# Altium PCB GPS_Proj.PcbDoc (part 2 of 2)
Units mil, origin at the board's own origin, x right, y up, seen from the top; angles counter-clockwise.
Board outline 1417.32 x 6305 mil, 4 copper layers (Top Layer, GND, VCC, Bottom Layer); 115 components, 144 nets, 456 pads, 265 vias.
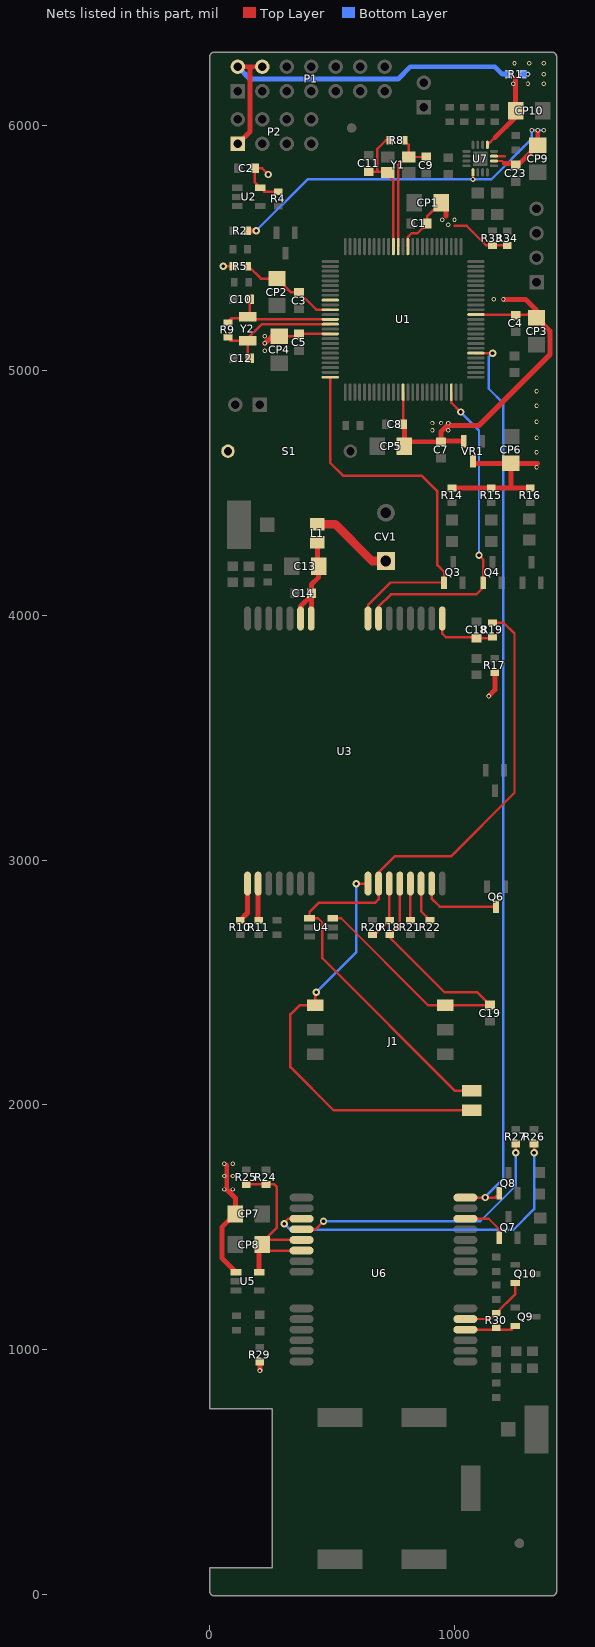
[diagram p4: the nets of this part, all layers, seen from the top]

## Via types
v1: diameter 30, hole 15, Top Layer to Bottom Layer, 219 vias
v2: diameter 18, hole 10, Top Layer to Bottom Layer, 43 vias
v3: diameter 20, hole 10, Top Layer to Bottom Layer, 3 vias

## Nets (pads, with @x,y where several pads share a name; then routed paths per layer and width w, separated by ;. In a path a pad name is that pad's centre, name@x,y a point inside that pad or via, vN(x,y) a via of type N, cw(c..) or ccw(c..) an arc to the next point about the centre after c; other vN are vias at no path point) (continued)
PLUSE: Q8.1 U1.56 U6.28 | length 3725.4
  Top Layer w10: U6.28@1044.65,1621.97 1165.91,1621.97 Q8.1@1182.6,1638.66 ; U1.56@1087.24,5070.55 v1(1155.55,5070.55)
  Bottom Layer w10: v1@1135,1621.97 1128.48,1628.48 1200,1700 1200,4865 1140,4925 1140,5055 v1(1155.55,5070.55)
  other v1: 1125,1621.97
PWRKEY: Q6.3 U3.14 | length 327.9
  Top Layer w10: U3.14@906.65,2904.13 906.65,2843.35 940,2810 Q6.3@1160,2810
REF+: U1.9
RI: Q3.1 U1.25 U3.23 | length 1622.3
  Top Layer w10: U1.25@492.76,4972.13 492.76,4622.24 545,4570 865,4570 930,4505 930,4205 957.6,4177.4 Q3.1@957.6,4133.66 738.66,4133.66 646.81,4041.81 U3.23@646.81,3986.81
RXDG: R27.1 U6.4 | length 1118.8
  Top Layer w10: U6.4@375.35,1492.05 432.05,1492.05 v1(465,1525) ; v1(1250,1805) R27.1@1250,1840.47
  Bottom Layer w10: v1(465,1525) 1105,1525 1250,1670 v1(1250,1805)
RXDM: R11.1 U3.2 | length 150.4
  Top Layer w20: U3.2@197.99,2904.13 197.99,2756.54 R11.1@200,2754.53
SIM_CLK: R21.1 U3.12 | length 149.6
  Top Layer w10: R21.1@820,2754.53 U3.12@820.04,2904.13 U3.12@820.04,2904.13
SIM_DATA: R18.2 R20.1 U3.10 | length 244.1
  Top Layer w10: R20.1@665,2695.47 675.94,2695.47 R18.2@735,2754.53 ; R18.2@733.43,2754.53 U3.10@733.43,2904.13
SIM_GND: J1.5 J1.8 U3.8 | length 1759.3
  Top Layer w10: v1(435,2460) 430.83,2455.83 J1.5@430.83,2407.01 367.01,2407.01 330,2370 330,2155 506.34,1978.66 J1.8@1070.59,1978.66 ; v1(599.13,2904.13) U3.8@646.81,2904.13
  Bottom Layer w10: v1(435,2460) 599.13,2624.13 v1(599.13,2904.13)
SIM_PRE: J1.4 R19.2 U3.9 U4.1 | length 2927.1
  Top Layer w10: J1.4@1070.59,2057.4 1002.6,2057.4 460,2600 460,2745 442.6,2762.4 U4.1@407.76,2762.4 407.76,2787.76 445,2825 675,2825 690.12,2840.12 U3.9@690.12,2904.13 690.12,2950.12 755,3015 985,3015 1245,3275 1245,3925 1200.47,3969.53 R19.2@1155,3969.53
SIM_RST: R22.1 U3.13 | length 164.8
  Top Layer w10: U3.13@863.35,2904.13 863.35,2791.18 R22.1@900,2754.53
SIM_VDD: C19.1 J1.1 R18.1 U3.11 U4.6 | length 1550.9
  Top Layer w10: U4.6@502.24,2762.4 537.6,2762.4 892.99,2407.01 J1.1@962.32,2407.01 C19.1@1145,2407.01 ; U3.11@776.73,2904.13 776.73,2737.2 R18.1@735,2695.47 735,2685 960,2460 1093.46,2460 C19.1@1145,2408.46
STATUS: Q4.1 U1.48 U3.22 | length 1339.9
  Top Layer w10: U3.22@690.12,3986.81 690.12,4035.12 740,4085 1088.94,4085 Q4.1@1117.6,4113.66 ; U1.48@986.85,4911.1 986.85,4868.15 v1(1025,4830) ; v1(1100,4245) 1117.6,4227.4 Q4.1@1117.6,4133.66
  Bottom Layer w10: v1(1025,4830) 1100,4755 v1(1100,4245)
TXDG: R26.1 U6.3@375.35,1535.35 | length 1412.7
  Top Layer w10: v1(305,1515) 305,1520 320.35,1535.35 U6.3@375.35,1535.35 ; v1(1325,1805) R26.1@1325,1840.47
  Bottom Layer w10: v1(305,1515) 330,1490 1240,1490 1325,1575 v1(1325,1805)
TXDM: R10.1 U3.1 | length 161.9
  Top Layer w20: R10.1@125,2754.53 154.68,2784.21 U3.1@154.68,2904.13
V_ANT: Q10.2 R30.2 U6.19 | length 290.8
  Top Layer w10: U6.19@1044.65,1125.91 1146.38,1125.91 R30.2@1170,1149.53 1248.66,1228.19 Q10.2@1248.66,1272.6
VAA: C3.1 CP2.1 R5.2 U1.11 | length 406.7
  Top Layer w10: R5.2@159.53,5425 209.41,5375.12 CP2.1@275,5375.12 331.65,5318.46 C3.1@365,5318.46 435.75,5247.72 U1.11@492.76,5247.72
VBAT: C23.1 CP6.1 CP7.1 CP9.1 CV1.1 L1.1 R2.2 R14.2 R15.2 R16.2 R17.2 R29.1 U5.1 U7.5 U7.10 U7.11 VR1.3 | length 3424.5
  Top Layer w10: VR1.3@1075,4628.66 VR1.3@1083.78,4619.88 ; v3@1075.47,5780 U7.5@1075.47,5808.9 ; U7.10@1161.1,5855.16 1194.84,5855.16 1205,5845 ; U7.11@1161.1,5874.84 1205,5874.84 ; C23.1@1250,5838.46 C23.1@1258.35,5838.46
  Top Layer w20: 70,1755 70,1655 104.88,1620.12 CP7.1@104.88,1555 50,1500.12 50,1375.16 U5.1@107.76,1317.4 ; R2.2@154.53,5570 v1(190,5570) ; v3(205,915) R29.1@205,950.47 ; R14.2@990,4519.53 R15.2@1150,4519.53 1230,4519.53 ; VR1.3@1083.78,4619.88 CP6.1@1230,4619.88 ; v3(1140,3670) 1165,3695 R17.2@1165,3765.47 ; 1205,5845 1243.46,5845 C23.1@1250,5838.46 ; C23.1@1258.35,5838.46 CP9.1@1340,5920.12 v2(1340,5980) ; R16.2@1310,4519.53 1230,4519.53 ; 1339.88,4619.88 CP6.1@1230,4619.88 ; 1230,4519.53 CP6.1@1230,4619.88
  Top Layer w35: L1.1@440,4372.4 512.6,4372.4 663.43,4221.57 CV1.1@720,4221.57
  Bottom Layer w10: v1(190,5570) 400,5780 v3(1075,5780) 1150,5780 1315,5945 v2(1315,5980) v2(1340,5980) v2(1365,5980)
  other v2: 60,1655 95,1655 60,1710 95,1710 60,1760 95,1760 1335,4605 1335,4665 1335,4725 1335,4790 1335,4855 1335,4915
VCC: C1.1 C2.1 C4.1 C5.1 C7.1 C8.1 CP1.1 CP3.1 CP4.1 CP5.1 R4.1 R5.1 R33.2 R34.2 S1.2 U1.16 U1.38 U1.64 U1.87 U2.5 VR1.2 | length 2811.5
  Top Layer w10: v1(55,5425) R5.1@95.47,5425 ; v1(240,5800) 215,5825 C2.1@183.46,5825 183.46,5769.65 U2.5@207.24,5745.87 223.58,5729.53 R4.1@280,5729.53 ; CP4.1@255.12,5140.12 CP4.1@285,5140.12 ; CP4.1@302.95,5140 365,5140 374.29,5149.29 U1.16@492.76,5149.29 ; C8.1@788.46,4780 790,4781.54 U1.38@790,4911.1 ; U1.87@809.68,5505.59 809.68,5544.69 825,5560 848.46,5560 C1.1@888.46,5600 888.46,5628.35 CP1.1@945.12,5685 CP1.1@965,5665.12 ; C7.1@945,4708.46 C7.1@947.88,4711.34 ; 1000,5590 1050,5590 1129.53,5510.47 R33.2@1155,5510.47 R34.2@1215,5510.47 ; U1.64@1087.24,5228.03 1297.8,5228.03 1309.88,5240.12 CP3.1@1335,5240.12 ; CP3.1@1335,5235.12 CP3.1@1335,5240.12 ; CP3.1@1340,5240.12 CP3.1@1335,5240.12
  Top Layer w20: v2(225,5110) CP4.1@255.12,5140.12 ; C8.1@790,4781.54 795.12,4776.42 CP5.1@795.12,4690 813.58,4708.46 C7.1@945,4708.46 ; C7.1@947.88,4711.34 965,4711.34 ; 965,5630 CP1.1@965,5665.12 ; VR1.2@1037.6,4711.34 965,4711.34 ; v2(1200,5290) 1290,5290 1335,5245 CP3.1@1335,5240.12 ; CP3.1@1335,5215.12 1390,5160.12 1390,5065 1100,4775 970,4775 945,4750 C7.1@945,4708.46 ; C7.1@945,4708.46 962.12,4708.46 965,4711.34
  other v2: 910,4755 975,4755 910,4785 945,4785 975,4785 225,5080 225,5140 1160,5290 975,5595 950,5615 1000,5615
VCC5V: CP10.1 R1.1 U7.13 | length 343.2
  Top Layer w10: U7.13@1134.53,5921.1 1163.43,5950 1165,5950 ; CP10.1@1249.88,6053.3 CP10.1@1249.88,6060
  Top Layer w20: 1165,5950 1249.88,6034.88 CP10.1@1249.88,6053.3 ; CP10.1@1249.88,6060 1249.88,6195.12
  Bottom Layer w20: R1.1@1279.53,6210 v2(1300,6210)
  other v2: 1240,6170 1300,6170 1365,6170 1365,6210 1245,6255 1305,6255 1365,6255
VCC_RF: Q9.2 R30.1 U6.18 | length 210.2
  Top Layer w10: U6.18@1044.65,1082.6 1233.66,1082.6 Q9.2@1248.66,1097.6
VDD_EXT_2.8V: C18.1 R19.1 U3.16 | length 274.7
  Top Layer w10: U3.16@949.96,3986.81 949.96,3925.04 965,3910 C18.1@1090,3910 ; C18.1@1090,3906.54 1151.06,3906.54 R19.1@1155,3910.47
VGPRS4V4: C13.1 C14.1 L1.2 U3.24 U3.25 | length 485.4
  Top Layer w20: U3.25@371.22,3986.81 371.22,4036.22 C14.1@414.53,4079.53 ; U3.24@414.53,3986.81 415.79,3988.07 C14.1@415.79,4080.79 ; L1.2@440,4297.6 440,4205.12 C13.1@445.12,4200 ; C13.1@445.12,4214.88 C13.1@445.12,4200 ; C14.1@414.53,4079.53 414.53,4074.53 C14.1@415.79,4090.47 ; C14.1@414.53,4079.53 414.53,4089.21 C14.1@415.79,4090.47 ; C14.1@414.53,4079.53 C14.1@415.79,4080.79 ; C14.1@415.79,4080.79 C14.1@415.79,4090.47 ; C14.1@415.79,4090.47 415.79,4125.79 445.12,4155.12 C13.1@445.12,4200
VGPS3V3: CP8.1 R24.2 R25.2 U5.5 U6.5 U6.6 | length 848.2
  Top Layer w10: R25.2@150,1675.47 R24.2@230,1675.47 264.53,1675.47 275,1665 275,1499.88 CP8.1@223.86,1448.74 ; CP8.1@215.12,1430 CP8.1@215.12,1414.88 ; U6.6@375.35,1405.43 224.57,1405.43 CP8.1@215.12,1414.88 ; U6.5@375.35,1448.74 CP8.1@223.86,1448.74 ; CP8.1@215.12,1414.88 202.56,1427.44 CP8.1@223.86,1448.74
  Top Layer w20: U5.5@202.24,1317.4 202.24,1402.01 CP8.1@215.12,1414.88
VJTAG: P1.2 P1.4 P2.1 R1.2 | length 1584.6
  Top Layer w20: P2.1@115,5925 165,5975 165,6240 ; P1.2@115,6240 165,6240 ; P1.4@215,6240 165,6240
  Bottom Layer w20: P1.2@115,6240 165,6190 770,6190 820,6240 1165,6240 1195,6210 R1.2@1210,6210
WAKE_UP: Q7.1 U6.26 | length 189.5
  Top Layer w10: U6.26@1044.65,1535.35 1139.65,1535.35 1182.6,1492.4 Q7.1@1182.6,1458.66
XTAL2_IN: C9.1 R8.2 U1.89 Y1.3 | length 531.5
  Top Layer w10: U1.89@770.32,5505.59 769.75,5506.16 769.75,5839.75 794.96,5864.96 Y1.3@808.31,5864.96 ; R8.2@794.53,5940 813.31,5921.22 Y1.3@813.31,5871.5 884.57,5871.5 C9.1@885,5871.93
XTAL2_OUT: C11.1 R8.1 U1.90 Y1.1 | length 544.7
  Top Layer w10: C11.1@650,5811.54 685,5811.54 ; Y1.1@721.69,5801.97 750.63,5773.03 U1.90@750.63,5505.59 ; Y1.1@726.69,5808.5 723.66,5811.54 685,5811.54 ; R8.1@735.47,5940 720,5940 685,5905 685,5811.54
XTAL_IN: C10.1 R9.2 U1.13 Y2.2 | length 520.1
  Top Layer w10: R9.2@70,5194.53 87.58,5212.11 Y2.2@162.11,5212.11 ; Y2.2@155,5219.21 Y2.2@162.11,5212.11 ; C10.1@163.46,5290 163.46,5213.46 Y2.2@162.11,5212.11 ; U1.13@492.76,5208.35 165.87,5208.35 Y2.2@162.11,5212.11
XTAL_OUT: C12.1 R9.1 U1.14 Y2.1 | length 536.6
  Top Layer w10: R9.1@70,5135.47 84.68,5120.79 Y2.1@155,5120.79 ; C12.1@163.46,5050 155,5058.46 Y2.1@155,5120.79 ; U1.14@492.76,5188.66 213.66,5188.66 155,5130 Y2.1@155,5120.79
pads on no net: Designator8.1 Designator9.1 J1.3@1017.32,2542.01 J1.6 P1.8 P1.10 P1.12 P1.13 P1.14 U1.24 U1.44 U1.52 U1.55 U1.57 U1.58 U2.3 U3.4 U3.6 U3.7 U3.18 U3.19 U3.20 U6. U6.1 U6.2 U6.3@490,1657.32 U6.8 U6.9 U6.10 U6.12 U6.21 U6.22 U6.23 U6.24 U6.25 U6.27 U7.12@1055,5915 Y1.2 Y1.4

## Polygon pours and split planes (outlines as drawn)
GGND on Top Layer "Bottom Layer-No Net" (solid, remove dead copper, pour order 4): 25,6275 25,25 1400,25 1400,6275
GGND on Bottom Layer "Bottom Layer-No Net" (solid, remove dead copper, pour order 6): 25,6275 25,25 1400,25 1400,6260 1385,6275
GGND on GND (split plane): 21.4,1871.4 23.05,1870.29 25,1869.9 1139.9,1869.9 1139.9,1810.1 25,1810.1 23.05,1809.71 21.4,1808.6 20.1,1807.31 20.1,1872.69
GGND on GND (split plane): 1392.13,25.1 25.1,25.1 25.1,89.9 255,89.9 258.92,90.29 262.69,91.43 266.17,93.29 269.21,95.79 271.71,98.83 273.57,102.31 274.71,106.08 275.1,110 275.1,760 274.71,763.92 273.57,767.69 271.71,771.17 269.21,774.21 266.17,776.71 262.69,778.57 258.92,779.71 255,780.1 25.1,780.1 25.1,1797.89 27.11,1799.9 1145,1799.9 1146.95,1800.29 1148.6,1801.4 1149.71,1803.05 1150.1,1805 1150.1,1875 1149.71,1876.95 1148.6,1878.6 1146.95,1879.71 1145,1880.1 27.11,1880.1 25.1,1882.11 25.1,4522.89 32.11,4529.9 925,4529.9 926.95,4530.29 928.6,4531.4 929.71,4533.05 930.1,4535 930.1,4575 929.71,4576.95 928.6,4578.6 926.95,4579.71 925,4580.1 30.1,4580.1 30.1,6274.02 1392.13,6274.02
GGND on GND (split plane): 20.29,4573.05 21.4,4571.4 23.05,4570.29 25,4569.9 919.9,4569.9 919.9,4540.1 30,4540.1 28.05,4539.71 26.4,4538.6 20.1,4532.31 20.1,4574.02
VCC on VCC (split plane): 1204.9,6252.89 1204.9,4922.11 867.99,4585.19 25.19,4585.19 25.19,6264.9 1192.89,6264.9
VBAT on VCC (split plane): 1397.23,15.1 20.1,15.1 20.1,89.9 255,89.9 258.92,90.29 262.69,91.43 266.17,93.29 269.21,95.79 271.71,98.83 273.57,102.31 274.71,106.08 275.1,110 275.1,760 274.71,763.92 273.57,767.69 271.71,771.17 269.21,774.21 266.17,776.71 262.69,778.57 258.92,779.71 255,780.1 20.1,780.1 20.1,4575 870.1,4575 872.05,4575.39 873.7,4576.49 1213.6,4916.4 1214.71,4918.05 1215.1,4920 1215.1,6255 1214.71,6256.95 1213.6,6258.6 1198.6,6273.6 1196.95,6274.71 1195,6275.1 25.19,6275.1 25.19,6279.12 25.04,6279.9 1397.23,6279.9

## Other copper
Top Layer:
  rectangle net GGND: 955,6125 1195,6210
  rectangle net VBAT: 45,1625 110,1775
  rectangle net VBAT: 1300,5960 1380,5995
  rectangle net VBAT: 1190,5835 1215,5880
  rectangle net VCC: 895,4740 990,4800
  rectangle net VCC: 1145,5270 1215,5305
  rectangle net VCC: 935,5580 1015,5630
  rectangle net VCC: 210,5070 240,5150
  rectangle net VBAT: 1305,4575 1390,4950
  rectangle net VCC5V: 1220,6150 1385,6275
GND (plane layer: these items are gaps in the copper):
  lines w10: 20,20.19 20,1800 25,1805 1145,1805 1145,1875 25,1875 20,1880 20,4525 30,4535 925,4535 925,4575 25,4575 25,6274.21 20.1,6279.12 1397.23,6279.12 1397.23,20.1 1397.13,20 20.19,20 20,20.19
VCC (plane layer: these items are gaps in the copper):
  lines w10: 20.1,6270 1195,6270 1210,6255 1210,4920 870.1,4580.1 20.1,4580.1 20.1,6279.12

## Silkscreen, mask and mechanical layers (free items; w line width, h text height)
Top Overlay:
  text "来电" at 1035,4345 h30
  text "状态" at 1195,4340 h30
  text "网络" at 1345,4340 h30
Top Solder:
  rectangle: 970,6155 1180,6275
  rectangle: 1220,6150 1385,6275
Mechanical 1:
  the board outline again, w10
Mechanical 3:
  text "4" at 1990.06,11571.87 h49.21
  text "10" at 2528.56,11565.06 h49.21
  text "4" at 3078.56,11560.06 h49.21
  text "4" at 5590.06,10971.87 h49.21
  text "X" at 2811.98,4790.96 h49.21
Mechanical 6:
  drawing of 720 lines, arcs and shapes, not listed
  text "DAUGHTER-BOARD PANEL" at 4120.69,11758.8 h49.21
  text "DESIGN INFORMATION" at 1906.55,11758.04 h49.21
  text "BOARD NAME:" at 3386.55,11758.04 h49.21
  text "BOARD TECHNOLOGY" at 1906.55,11658.04 h49.21
  text "BOARD SIZE (REFER ALSO PROFILING INFORMATION)" at 3806.55,11658.04 h49.21
  text "X" at 4541.55,11538.04 h49.21
  text "(MIN. TRACK/   PADS  /   CLEARANCE     IN 0.001'')" at 1846.55,11458.04 h49.21
  text "MINIMUM ANNULAR RING 0.05MM (0.002'') EXTERNAL PER IPC-2221 CLASS 3 LEVEL C AND IS THE" at 1906.55,11358.05 h49.21
  text "MANUFACTURING REGISTRATION ALLOWANCE" at 1906.55,11268.04 h49.21
  text "LAND SIZE CALCULATION MINIMUM - NOMINAL HOLE SIZE + 0.508MM (0.020'')" at 1906.55,11158.04 h49.21
  text "CIRCUIT TYPE:" at 1906.55,10978.04 h49.21
  text "SS" at 2806.55,10978.04 h49.21
  text "DS" at 3506.55,10978.04 h49.21
  text "X" at 4081.55,10978.04 h49.21
  text "PTH" at 4206.55,10978.04 h49.21
  text "ML" at 4636.55,10978.04 h49.21
  text "X" at 4786.55,10978.04 h49.21
  text "No. of Layers" at 4906.55,10978.04 h49.21
  text "FINGER CONNECTOR DIM PER:" at 1906.55,10858.04 h49.21
  text "AS SHOWN" at 4906.55,10858.04 h49.21
  text "No. OFF TOTAL" at 2566.55,10748.04 h49.21
  text "ONE SIDE" at 4206.55,10748.04 h49.21
  text "BOTH SIDES" at 4906.55,10738.04 h49.21
  text "X" at 3379.46,10636.97 h49.21
  text "VIAS:" at 1906.55,10633.04 h49.21
  text "NONE" at 2356.55,10633.04 h49.21
  text "X" at 2686.55,10633.04 h49.21
  text "FEED THRU'" at 2806.55,10633.04 h49.21
  text "TENTED" at 3506.55,10633.04 h49.21
  text "BURIED LAYER SEQUENCE" at 4206.55,10633.04 h49.21
  text "UNIQUE DRILL" at 2806.55,10513.04 h49.21
  text "2 SIZE" at 3506.55,10513.04 h49.21
  text "BLIND LAYER SEQUENCE" at 4206.55,10513.04 h49.21
  text "Layer Stack Manager (PCB)" at 3301.55,10423.04 h49.21
  text "X" at 4786.55,10423.04 h49.21
  text "AS SHOWN" at 4906.55,10423.04 h49.21
  text "LAYER CONSTRUCTION PER:" at 1906.55,10418.04 h49.21
  text "ARTWORK:" at 1906.55,10308.04 h49.21
  text "MANUAL" at 2806.55,10308.04 h49.21
  text "DIGITISED" at 3506.55,10308.04 h49.21
  text "X" at 4086.55,10308.04 h49.21
  text "CAD" at 4206.55,10308.04 h49.21
  text "TYPE" at 4636.55,10308.04 h49.21
  text "ARTWORK/PATTERN MASTER LIST" at 1906.55,10123.04 h49.21
  text "DESCRIPTION" at 1956.55,10028.04 h49.21
  text "DRAWING No./CAD FILE REF." at 2691.55,10028.04 h49.21
  text "LAYER NAME" at 4316.55,10028.04 h49.21
  text "GERBER FILE REF" at 5133.56,10025.04 h49.21
  text "PCB FILE" at 1896.55,9928.04 h49.21
  text "Top Paste Mask" at 4250.57,9828.04 h49.21
  text "GTP" at 3975,9826.1 h49.21
  text "GTP" at 5928.56,9825.04 h49.21
  text "GERBER FILE" at 1896.55,9823.04 h49.21
  text "GTO" at 3975,9727.67 h49.21
  text "GTO" at 5926.55,9727.05 h49.21
  text "Top Overlay" at 4250.57,9726.03 h49.21
  text "GERBER FILE" at 1896.55,9723.04 h49.21
  text "Top Solder Mask" at 4250.57,9630.04 h49.21
  text "GTS" at 3975,9629.25 h49.21
  text "GTS" at 5928.56,9625.04 h49.21
  text "GERBER FILE" at 1896.55,9623.04 h49.21
  text "Board Layer 1" at 5134.82,9531.94 h49.21
  text "Top Layer" at 4250.57,9528.05 h49.21
  text "GTL" at 5928.56,9525.04 h49.21
  text "GERBER FILE" at 1896.55,9523.04 h49.21
  text "GTL" at 3975,9522.95 h49.21
  text "Board Layer 2" at 5125.69,9132.02 h49.21
  text "GP1" at 3973.4,9130.37 h49.21
  text "GP1" at 5930.09,9130.37 h49.21
  text "GND" at 4247.72,9128.1 h49.21
  text "GERBER FILE" at 1896.55,9125.4 h49.21
  text "Board Layer 3" at 5129.62,8939.11 h49.21
  text "GP2" at 3971.08,8928.44 h49.21
  text "GP2" at 5927.77,8928.44 h49.21
  text "VCC" at 4245.06,8925.65 h49.21
  text "GERBER FILE" at 1896.55,8923.82 h49.21
  text "Board Layer 4" at 5126.94,8634.31 h49.21
  text "BOTTOM LAYER" at 4243.44,8629.61 h49.21
  text "GBL" at 3967.87,8626.73 h49.21
  text "GBL" at 5921.43,8626.62 h49.21
  text "GERBER FILE" at 1896.55,8626.19 h49.21
  text "GBS" at 3967.87,8532.24 h49.21
  text "Bottom Solder Mask" at 4243.44,8531.62 h49.21
  text "GBS" at 5921.43,8526.62 h49.21
  text "GERBER FILE" at 1896.55,8526.19 h49.21
  text "GBO" at 3967.87,8429.88 h49.21
  text "Bottom Overlay" at 4243.44,8429.61 h49.21
  text "GBO" at 5921.43,8426.62 h49.21
  text "GERBER FILE" at 1896.55,8426.19 h49.21
  text "GBP" at 5921.43,8331.62 h49.21
  text "Bottom Paste Mask" at 4243.44,8329.61 h49.21
  text "GBP" at 3967.87,8327.67 h49.21
  text "GERBER FILE" at 1896.55,8326.19 h49.21
  text "APERTURE LIST" at 1896.55,8128.29 h49.21
  text "APR" at 3967.93,8125.3 h49.21
  text "DRILL REPORT" at 1896.55,8028.29 h49.21
  text "DRR" at 3967.93,8025.3 h49.21
  text "DRILL FILE" at 1886.08,7925.66 h49.21
  text "DRL" at 3963.01,7919.99 h49.21
  text "TXT" at 3956.94,7825.26 h49.21
  text "EXCELLON DRILL" at 1883.12,7822.31 h49.21
  text "MATERIAL:" at 1906.55,7617.38 h49.21
  text "GLASS FIBRE EPOXY RESIN NEMA GRADE FR4-08 (IPC-4101) - WITH TG170" at 2916.55,7607.38 h49.21
  text "X" at 2811.55,7602.38 h49.21
  text "THICKNESS:" at 2216.55,7492.38 h49.21
  text "0.8mm" at 2916.55,7492.38 h49.21
  text "1.2mm" at 3611.55,7492.38 h49.21
  text "1.6mm" at 4306.54,7492.4 h49.21
  text "2.4mm" at 5006.55,7492.38 h49.21
  text "3.2mm" at 5706.55,7492.38 h49.21
  text "X" at 4211.55,7487.38 h49.21
  text "2" at 4060.02,7378.4 h49.21
  text "TOLERANCE:" at 2211.55,7372.38 h49.21
  text "OTHER +/-" at 5006.55,7372.38 h49.21
  text "X" at 2811.55,7367.38 h49.21
  text "IN A/W IPC-D-300G CLASS" at 2938.05,7364.5 h49.21
  text "2" at 4060.02,7256.35 h49.21
  text "BOW & TWIST:" at 2211.04,7252.38 h49.21
  text "AS SHOWN" at 5011.55,7247.38 h49.21
  text "IN A/W IPC-D-300G CLASS" at 2938.05,7244.5 h49.21
  text "X" at 2811.55,7242.38 h49.21
  text "COPPER THICKNESS (FINISHED)" at 2115.13,7134.31 h49.21
  text "18um" at 2916.55,7032.38 h49.21
  text "35um" at 3981.55,7032.38 h49.21
  text "70um" at 5016.55,7032.38 h49.21
  text "OUTER:" at 2256.87,7028.01 h49.21
  text "X" at 3873.56,7024.39 h49.21
  text "18um" at 2916.55,6912.38 h49.21
  text "35um" at 3981.55,6912.38 h49.21
  text "70um" at 5016.55,6912.38 h49.21
  text "INNER SIGNAL:" at 2115.13,6909.9 h49.21
  text "X" at 3874,6908 h49.21
  text "INNER PWR:" at 2256.87,6791.79 h49.21
  text "18um" at 2916.55,6792.38 h49.21
  text "35um" at 3981.55,6792.38 h49.21
  text "70um" at 5016.55,6792.38 h49.21
  text "X" at 2808.05,6787.85 h49.21
  text "STRUCTURE:" at 1906.55,6672.38 h49.21
  text "REFER" at 2916.55,6672.38 h49.21
  text "AS PER DRAWING No." at 2911.55,6547.38 h49.21
  text "AS SHOWN" at 5011.55,6547.38 h49.21
  text "X" at 4911.55,6542.38 h49.21
  text "DRILLING:" at 1906.55,6437.38 h49.21
  text "COMPONENT SIDE" at 2916.55,6347.38 h49.21
  text "SOLDER SIDE" at 3971.55,6347.38 h49.21
  text "VIEWED FROM:" at 2182.06,6339.03 h49.21
  text "X" at 2811.55,6337.38 h49.21
  text "REFERENCE:" at 2191.55,6227.38 h49.21
  text "AS SHOWN" at 2911.55,6222.38 h49.21
  text "PATTERN MASTER LIST" at 3976.55,6222.38 h49.21
  text "X" at 4911.55,6222.38 h49.21
  text "NC_DRILL FILES" at 5011.55,6222.38 h49.21
  text "X" at 2811.55,6217.38 h49.21
  text "20um" at 3981.55,6107.38 h49.21
  text "PTH MINIMUM COPPER THICKNESS:" at 2193.87,6102.81 h49.21
  text "X" at 3876.55,6102.38 h49.21
  text "OTHER" at 5011.55,6102.38 h49.21
  text "NPTH:" at 2189.94,5988.64 h49.21
  text "TENTED" at 2911.55,5982.38 h49.21
  text "X" at 3876.55,5982.38 h49.21
  text "PADS REMOVED" at 3976.55,5982.38 h49.21
  text "REMOVE PADS" at 5011.55,5982.38 h49.21
  text "X" at 2811.55,5977.38 h49.21
  text "2nd DRILL" at 2911.55,5862.38 h49.21
  text "BOTH" at 3976.55,5862.38 h49.21
  text "AS SHOWN" at 4461.55,5862.38 h49.21
  text "NONE" at 5011.55,5862.38 h49.21
  text "BOARD FINISH:" at 1906.55,5747.38 h49.21
  text "X" at 2811.55,5742.38 h49.21
  text "ETCHING" at 2911.55,5742.38 h49.21
  text "REFER PATTERN MASTER LIST" at 3976.55,5742.38 h49.21
  text "NONE" at 3245.13,5626.75 h49.21
  text "LEGEND / SCREEN PRINT:" at 2158.44,5626.43 h49.21
  text "COMPONENT" at 3976.43,5625.37 h49.21
  text "SOLDER" at 5012.85,5622.81 h49.21
  text "X" at 3876.43,5620.37 h49.21
  text "X" at 4912.85,5617.81 h49.21
  text "WHITE" at 2914.43,5512.57 h49.21
  text "COLOUR:" at 2390.72,5508.32 h49.21
  text "X" at 2814.43,5507.57 h49.21
  text "YELLOW" at 3976.55,5502.38 h49.21
  text "OTHER" at 5011.55,5502.38 h49.21
  text "SOLDER RESIST:" at 2150.57,5382.34 h49.21
  text "X" at 2811.55,5382.38 h49.21
  text "LIQUID PHOTOIMAGEABLE" at 2911.55,5382.38 h49.21
  text "SCREEN PRINT" at 4461.55,5382.38 h49.21
  text "FINISH:" at 2402.54,5264.23 h49.21
  text "MATTE" at 2911.55,5262.38 h49.21
  text "GLOSS" at 3411.55,5262.38 h49.21
  text "X" at 3306.55,5257.38 h49.21
  text "COLOUR:" at 2390.72,5146.12 h49.21
  text "X" at 3320,5145 h49.21
  text "BLACK" at 2911.55,5142.38 h49.21
  text "GREEN" at 3411.55,5142.38 h49.21
  text "YELLOW" at 3976.55,5142.38 h49.21
  text "BLUE" at 4461.55,5142.38 h49.21
  text "OTHER" at 5011.55,5142.38 h49.21
  text "TRACK FINISH:" at 1906.55,5027.38 h49.21
  text "SELECTIVE SOLDER (HASL)" at 2911.55,5022.38 h49.21
  text "REFLOW SOLDER" at 4461.55,5022.38 h49.21
  text "0.1um - 0.2um ELECTROLESS GOLD OVER 3um NICKEL" at 2914.35,4909.9 h49.21
  text "X" at 2811.98,4905.96 h49.21
  text "IMMERSION GOLD" at 2911.55,4782.38 h49.21
  text "OTHER" at 4461.55,4782.38 h49.21
  text "EDGE BOARD" at 1906.55,4667.38 h49.21
  text "1.3um HARD GOLD OVER 5um     NICKEL / TIN-NICKEL" at 2911.55,4662.38 h49.21
  text "CONTACTS:" at 1906.55,4582.38 h49.21
  text "HARD FINISH GOLDE PLATE" at 2911.55,4542.38 h49.21
  text "OTHER" at 4461.55,4542.38 h49.21
  text "AS SHOWN" at 2911.55,4422.38 h49.21
  text "REFER" at 4461.55,4422.38 h49.21
  text "PROFILING:" at 1906.55,4302.38 h49.21
  text "AS DIMENSIONED, MEASURED AND CUT FROM SPECIFIED DATUM." at 2911.55,4302.38 h49.21
  text "X" at 2811.55,4297.38 h49.21
  text "REFER PCB BLANK DWG No." at 2916.55,4187.38 h49.21
  text "USE PROFILE / ROUTE TAPE SUPPLIED (REFER PATTERN MASTER LIST)" at 2916.55,4067.38 h49.21
  text "X" at 4205.69,3949.27 h49.21
  text "SQUARE CUT" at 2916.55,3947.38 h49.21
  text "N.C. ROUTE" at 3616.55,3947.38 h49.21
  text "V. SCORE" at 4316.55,3947.38 h49.21
  text "BLANK" at 5016.55,3947.38 h49.21
  text "ACCEPTABILITY:" at 1906.55,3842.38 h49.21
  text "MATERIALS AND WORKMANSHIP FOR ALL PRINTED WIRING BOARDS TO MEET" at 2781.55,3837.38 h49.21
  text "OR EXCEED THE REQUIREMENTS OF:" at 2781.55,3727.38 h49.21
  text "RECOMMENDED LAYUP" at -1914.06,3662.89 h49.21
  text "IPC-6011/12 AND IPC-A-600E" at 2921.55,3622.38 h49.21
  text "1" at 4321.55,3622.38 h49.21
  text "2" at 4671.55,3622.38 h49.21
  text "3" at 5021.79,3619.94 h49.21
  text "X" at 4566.55,3617.38 h49.21
  text "X" at 2816.55,3612.38 h49.21
  text "UL CERTIFICATION" at 2921.55,3502.38 h49.21
  text "AUSTEL" at 4321.55,3502.38 h49.21
  text "X" at 2816.55,3497.38 h49.21
  text "ML-P-55110F GRP" at 2901.55,3382.38 h49.21
  text "A" at 3621.55,3382.38 h49.21
  text "B" at 3971.55,3382.38 h49.21
  text "AS2546" at 4321.55,3382.38 h49.21
  text "OTHER" at 5021.55,3382.38 h49.21
  text "LAYER STACK CONFIGURATION" at -2334.3,3258.45 h49.21
  text "ADDITIONAL REQUIREMENTS:" at 1898.6,3252.42 h49.21
  text "NONE" at 2920.21,3150.92 h49.21
  text "SAMPLE PLAN" at 3620.21,3150.92 h49.21
  text "MIL-P-55110E SERIAL Nos. PER ORDER" at 4398.95,3150.92 h49.21
  text "X" at 2813.95,3150.33 h49.21
  text "MICROSECTION:" at 2103.32,3146.12 h49.21
  text "NONE" at 2923.95,3025.41 h49.21
  text "CERTIFICATION:" at 2099.39,3020.13 h49.21
  text "A" at 4397.14,3016.24 h49.21
  text "MIL-P-55110E GRP" at 3615.88,3014.27 h49.21
  text "B" at 4608.4,3013.13 h49.21
  text "1" at 5580.84,3009.19 h49.21
  text "2" at 5792.1,3006.08 h49.21
  text "3" at 6008.64,3006.08 h49.21
  text "IPC CLASS:" at 5013.52,3002.46 h49.21
  text "RoHS Compliant" at 2923.95,2899.43 h49.21
  text "X" at 2813.95,2894.43 h49.21
  text "X" at 3512.3,2890.92 h49.21
  text "QUALITY RELEASE REPORT" at 3615.88,2888.28 h49.21
  text "OTHER" at 5017.61,2886.32 h49.21
  text "NONE" at 2921.79,2772.97 h49.21
  text "REQUIRED (100% PADS & NETS)" at 3621.79,2772.97 h49.21
  text "PER ORDER" at 5025.72,2769.03 h49.21
  text "ELECTRICAL TEST:" at 2099.39,2768.17 h49.21
  text "X" at 3516.79,2767.97 h49.21
  text "NONE" at 2921.79,2646.98 h49.21
  text "1 SIDE" at 3616.79,2646.98 h49.21
  text "2 SIDES" at 4384.62,2647.5 h49.21
  text "MIN. PITCH" at 5017.85,2647.5 h49.21
  text "0.6mm" at 5552.85,2647.5 h49.21
  text "SURFACE MOUNT:" at 2095.45,2642.18 h49.21
  text "X" at 4296.63,2639.5 h49.21
  text "4 LAYER BUILD" at -1987.5,2629 h49.21
  text "FOIL" at 4400.53,2523.36 h49.21
  text "Bottom Overlay" at 5536.63,2519.98 h49.21
  text "NONE" at 3621.79,2519.43 h49.21
  text "LEGEND" at 4744.23,2519.43 h49.21
  text "REFER" at 5216.79,2519.43 h49.21
  text "X" at 4638.28,2517.89 h49.21
  text "X" at 5110.72,2517.89 h49.21
  text "MANUFACTURER'S ID/LOGO:" at 2095.45,2508.32 h49.21
  text "NONE" at 4402.54,2398.09 h49.21
  text "ISO9001/AS3901" at 3622.57,2391.08 h49.21
  text "MANUFACTURER'S ACCREDITATION:" at 2095.45,2386.28 h49.21
  text "X" at 3517.57,2386.08 h49.21
  text "-  COPPER CLAD" at -1232.3,2378.17 h29.53
  text "-  35 Micron H.T.E 1.4mil" at -804.3,2378.18 h29.53
  text "TOP LAYER" at -2777,2374 h49.21
  text "TL" at -2277.82,2373.17 h49.21
  text "PACKAGING AND HANDLING:" at 2095.45,2276.04 h49.21
  text "REFER" at 4400.53,2267.61 h49.21
  text "PER ORDER" at 3621.79,2263.68 h49.21
  text "X" at 3516.79,2253.68 h49.21
  text "P1" at -2278.14,2240.26 h49.21
  text "INTERNAL PLANE 1" at -2962.84,2236.71 h49.21
  text "P2" at -2282,1993 h49.21
  text "INTERNAL PLANE 2" at -2969.45,1991 h49.21
  text "BOTTOM LAYER" at -2856.54,1728.83 h49.21
  text "BL" at -2279.66,1729.14 h49.21
  text "1.6mm" at -1595.13,1451.24 h49.21
  text "TOTAL BOARD THICKNESS: APPROX" at -2876.23,1445.37 h49.21
  text "(61.2mil)" at -1328.98,1445.37 h49.21
Drill Drawing:
  text ".legend" at 1580,35 h60

## Text inside footprints (layer, text, board x,y; h text height)
BT1: Top Overlay "+" at 897.72,5980.51 h30 r90
CV1: Top Overlay "+" at 749.53,4065.08 h30 r90
P1: Top Overlay "2" at 10,6220 h30; Top Overlay "1" at 20,6105 h30; Top Overlay "14" at 710,6330 h30; Top Overlay "13" at 695,6040 h30
P2: Top Overlay "2" at 15,6005 h30; Top Overlay "1" at 35,5905 h30; Top Overlay "7" at 475,5905 h30; Top Overlay "8" at 475,6005 h30